# Altium PCB ESC.PcbDoc
Units mil, origin at the board's own origin, x right, y up, seen from the top; angles counter-clockwise.
Board outline 1806 x 1305.72 mil, 2 copper layers (Top Layer, Bottom Layer); 51 components, 38 nets, 153 pads, 0 vias.
Unrouted connection lines stored in the file: 79.
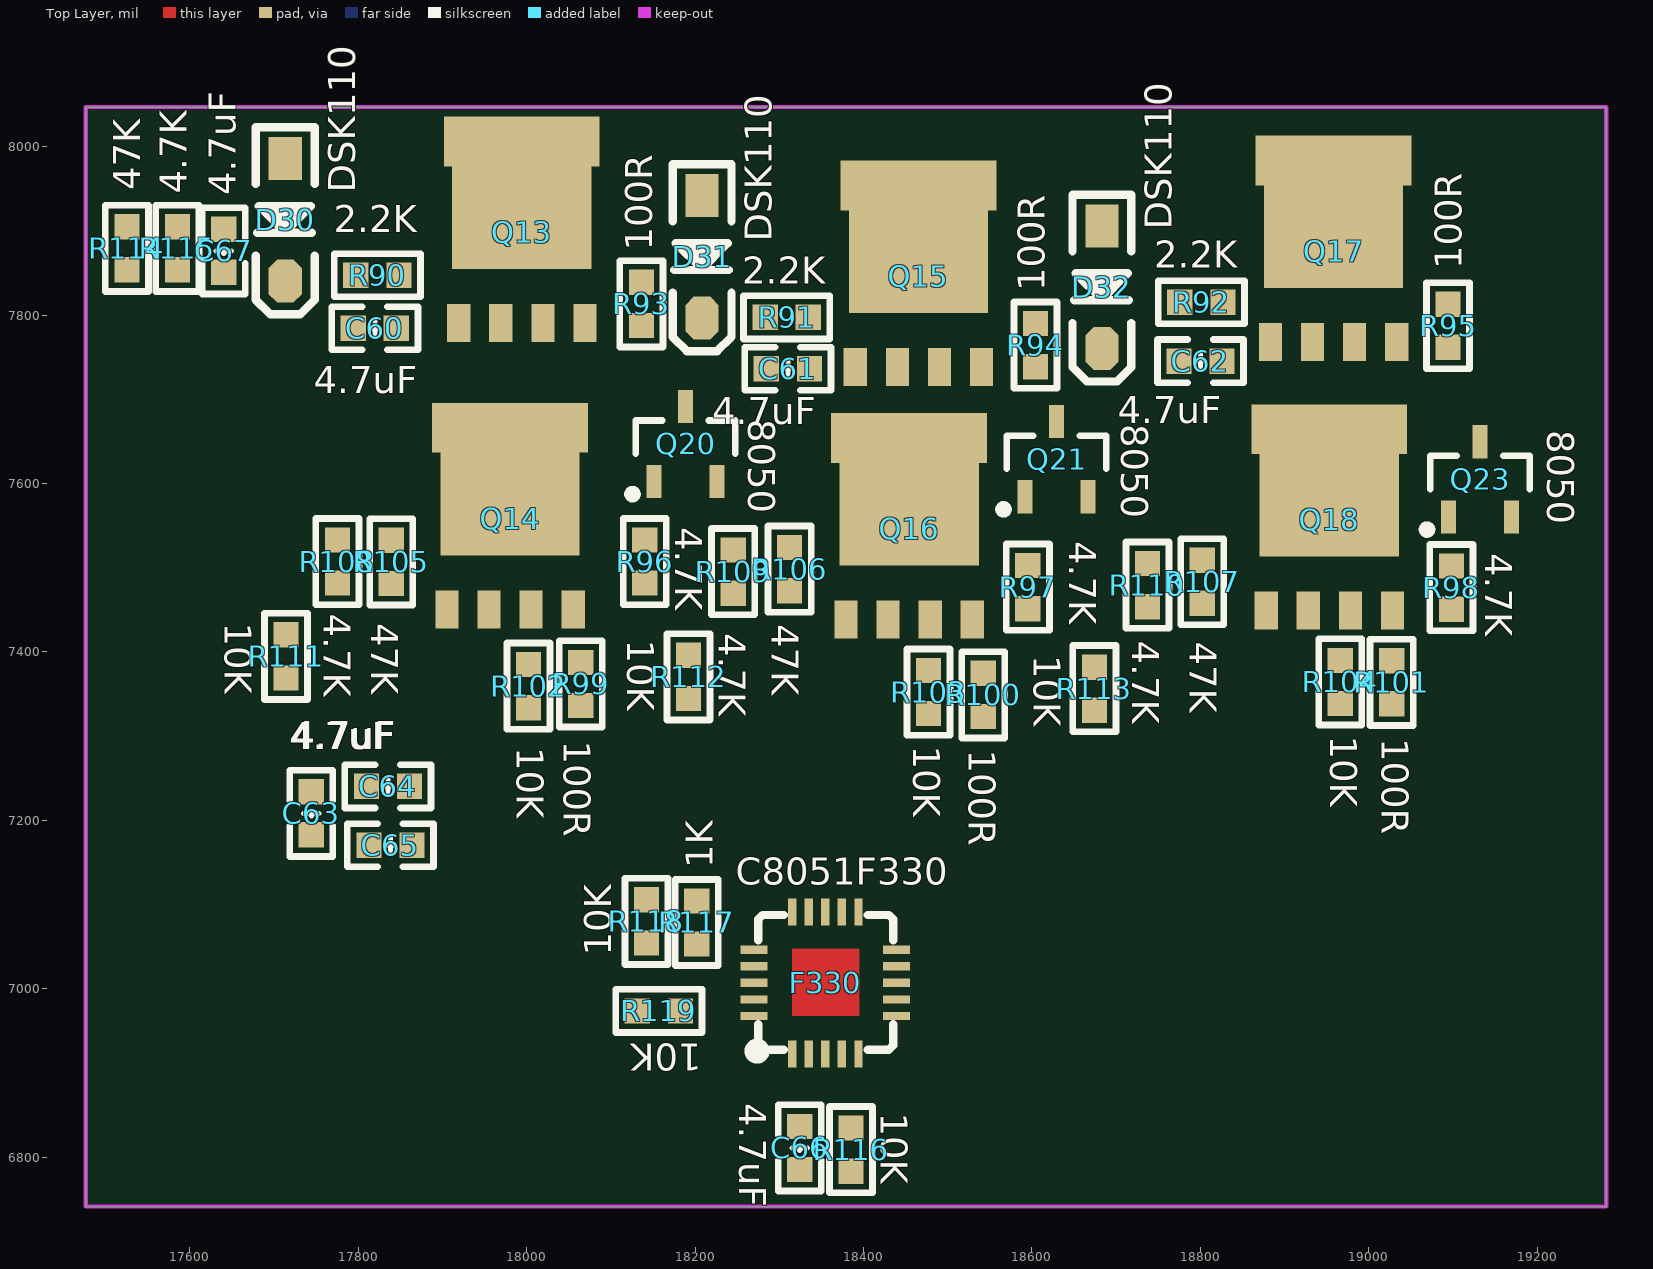
[diagram p0: Top Layer view]
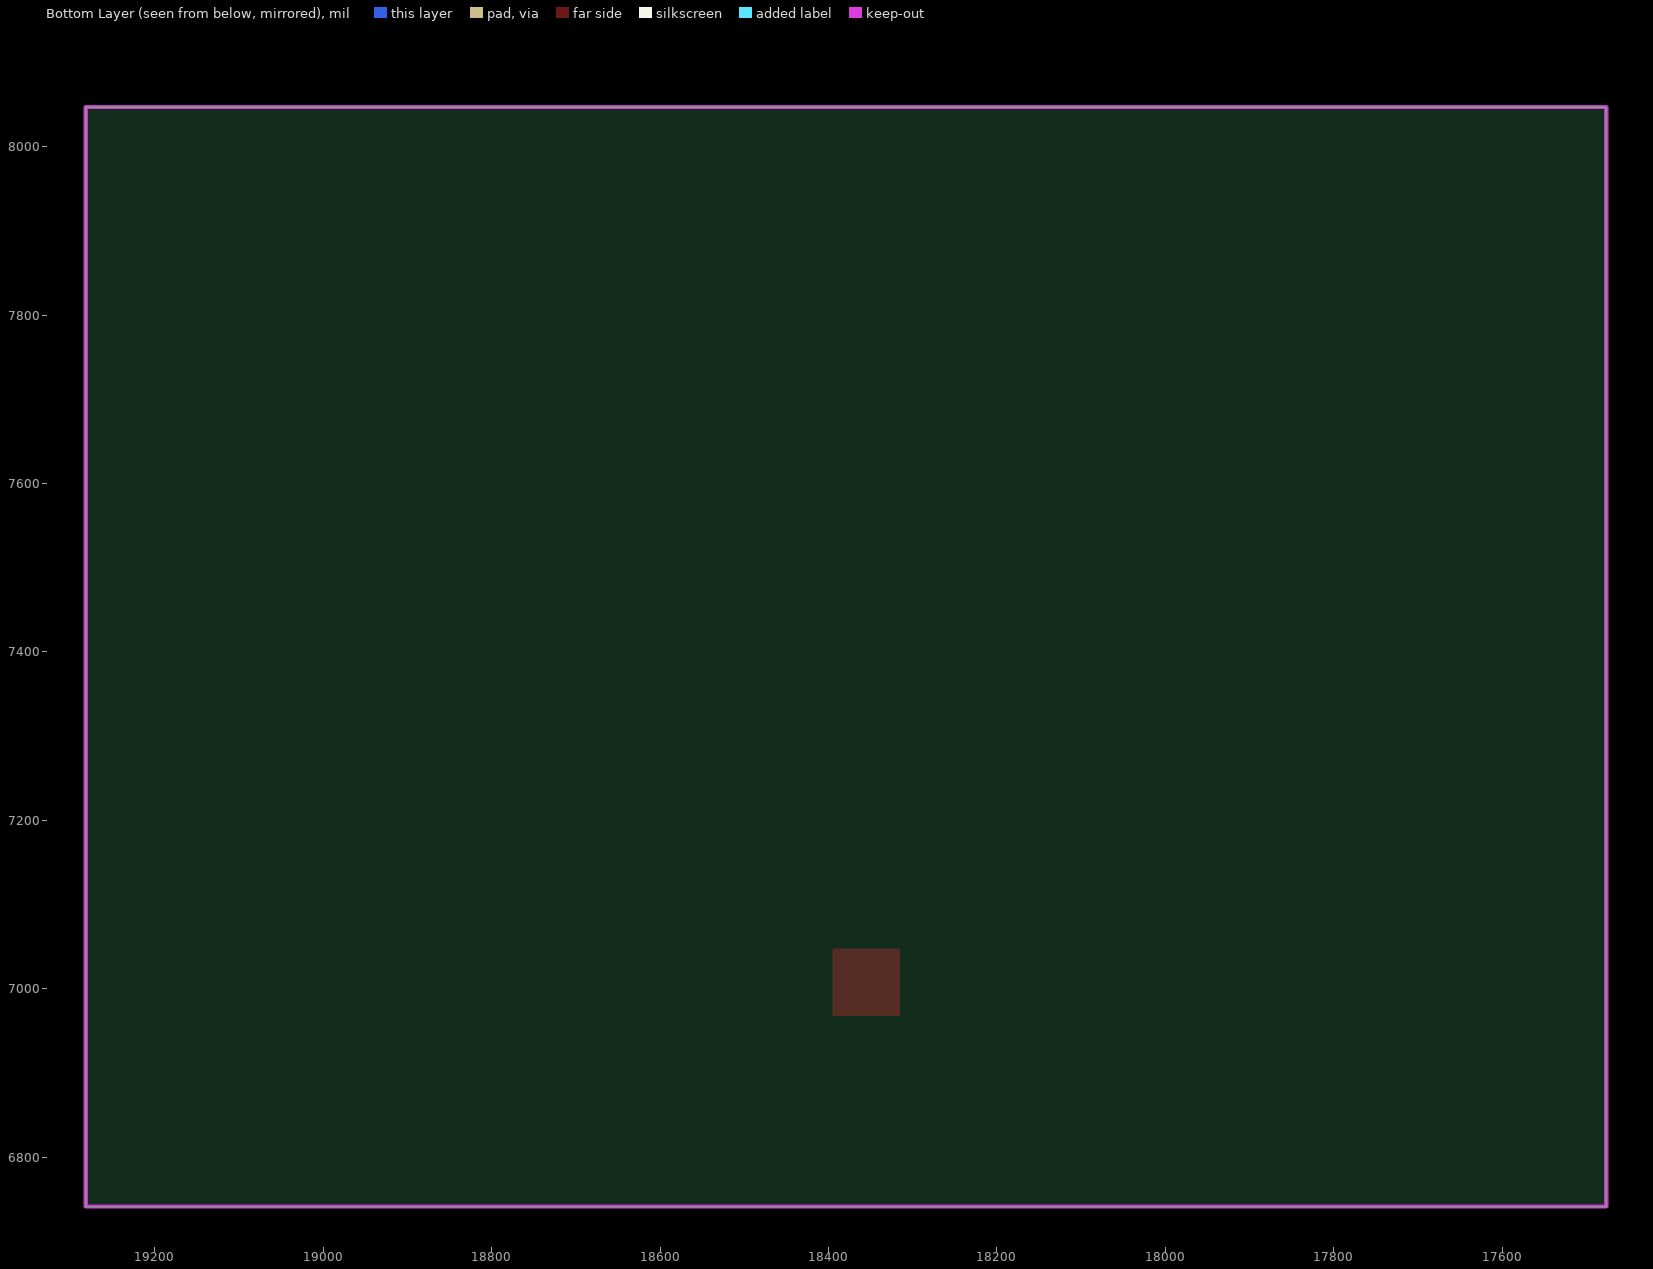
[diagram p1: Bottom Layer view, seen from below]

## Layer stack, top to bottom
Top Solder: solder mask 0.4, Solder Resist, Dk 3.5
Top Layer: signal copper 1.4
Dielectric1: core 12.6, FR-4, Dk 4.8
Bottom Layer: signal copper 1.4
Bottom Solder: solder mask 0.4, Solder Resist, Dk 3.5

## Board outline
17476.22,6741.22 19282.22,6741.22 19282.22,8046.94 17476.22,8046.94

## Design rules (kind name [scope] priority, off if disabled: settings)
Clearance [All] p1: gap=6 except(10: Arc-Poly Arc-Region Track-Poly Track-Region SMDPad-Poly SMDPad-Region THPad-Poly THPad-Region Via-Poly Via-Region Fill-Poly Fill-Region Poly-Poly Poly-Region Region-Region)
ComponentClearance [All] p1 off: gap=10 collisioncheckmode=3 verticalgap=10 showdistances=FALSE
HoleToHoleClearance [All] p1: gap=6 allowstackedmicrovias=TRUE
MinimumSolderMaskSliver [All] p1 off: minsoldermaskwidth=10
PlaneClearance [All] p1: clearance=15
PlaneConnect [All] p1: planeconnectstyle=Direct reliefexpansion=20 reliefentries=4 reliefconductorwidth=10 reliefairgap=10
PolygonConnect [All] p1: connectstyle=Direct reliefconductorwidth=10 reliefentries=4 polygonreliefangle="90 Angle" airgapwidth=10
RoomDefinition ESC [InComponentClass('ESC')] p1: confinementstyle=ConfineIn formatcopy=TRUE lockcomponents=FALSE outline 0,0 2000,0 2000,1000 0,1000
RoutingCorners [All] p1: cornerstyle=45-Degree minsetback=500 maxsetback=100
RoutingVias [All] p1: holewidth=12 width=24 viastyle="Through Hole" minholewidth=12 minwidth=24 maxholewidth=50 maxwidth=200
SilkToSilkClearance [All] p1 off: silktosilkclearance=10
SilkToSolderMaskClearance SilkscreenOverComponentPads [IsPad] p1 off: minsilkscreentomaskgap=10 clearancetoexposedcopper=TRUE
SolderMaskExpansion [All] p1: expansion=4
Width [All] p1: maxlimit=100 minlimit=6 preferedwidth=8
22 further rules are at their usual default settings.

## Components (designator, comment, footprint, x,y, rotation, side; value= is the part's Value field where it differs from the comment)
C60 "4.7uF" "C 0603_L" 17819.62,7784.21 r180 top
C61 "4.7uF" "C 0603_L" 18310.22,7736.22 r180 top
C62 "4.7uF" "C 0603_L" 18800.22,7745.22 r180 top
C63 "4.7uF" "C 0603_L" 17744.22,7208.22 r90 top
C64 "4.7uF" "C 0603_L" 17835.22,7240.22 r180 top
C65 "4.7uF" "C 0603_L" 17838.22,7170.22 r180 top
C66 "4.7uF" "C 0603_L" 18324.21,6810.81 r90 top
C67 "4.7uF" "C 0603_L" 17640.22,7876.22 r90 top
D30 "DSK110" SOD-123F 17713.22,7913.05 r270 top
D31 "DSK110" SOD-123F 18208.22,7869.05 r270 top
D32 "DSK110" SOD-123F 18683.22,7833.05 r270 top
F330 "C8051F330" QFN20_4*4_L 18354.59,7006.85 r90 top
Q13 "NTMFS5C628NLT" SO_8FL_DFN5 17994.22,7898.22 r0 top
Q14 "NTMFS5C628NLT" SO_8FL_DFN5 17980.22,7558.22 r0 top
Q15 "NTMFS5C628NLT" SO_8FL_DFN5 18465.22,7845.99 r0 top
Q16 "NTMFS5C628NLT" SO_8FL_DFN5 18454.22,7546.22 r0 top
Q17 "NTMFS5C628NLT" SO_8FL_DFN5 18958.22,7875.71 r0 top
Q18 "NTMFS5C628NLT" SO_8FL_DFN5 18953.22,7556.71 r0 top
Q20 "8050" SOT23-3L 18188.62,7647.22 r0 top
Q21 "8050" SOT23-3L 18629.22,7629.22 r0 top
Q23 "8050" SOT23-3L 19132.22,7605.22 r0 top
R90 "2.2K" "R 0603_L" 17822.62,7847.21 r180 top
R91 "2.2K" "R 0603_L" 18308.81,7797.21 r180 top
R92 "2.2K" "R 0603_L" 18801.22,7815.22 r180 top
R93 "100R" "R 0603_L" 18136.22,7813.22 r270 top
R94 "100R" "R 0603_L" 18604.22,7764.22 r270 top
R95 "100R" "R 0603_L" 19094.22,7787.22 r270 top
R96 "4.7K" "R 0603_L" 18140.22,7507.22 r90 top
R97 "4.7K" "R 0603_L" 18595.21,7476.81 r90 top
R98 "4.7K" "R 0603_L" 19098.22,7476.22 r90 top
R99 "100R" "R 0603_L" 18064.22,7361.81 r270 top
R100 "100R" "R 0603_L" 18542.22,7348.81 r270 top
R101 "100R" "R 0603_L" 19027.22,7363.81 r270 top
R102 "10K" "R 0603_L" 18002.22,7359.22 r90 top
R103 "10K" "R 0603_L" 18477.22,7352.22 r90 top
R104 "10K" "R 0603_L" 18966.22,7364.22 r90 top
R105 "47K" "R 0603_L" 17839.21,7506.81 r90 top
R106 "47K" "R 0603_L" 18312.22,7498.22 r90 top
R107 "47K" "R 0603_L" 18802.22,7483.22 r90 top
R108 "4.7K" "R 0603_L" 17775.22,7507.22 r270 top
R109 "4.7K" "R 0603_L" 18245.22,7495.22 r270 top
R110 "4.7K" "R 0603_L" 18737.22,7479.22 r270 top
R111 "10K" "R 0603_L" 17714.21,7394.63 r90 top
R112 "10K" "R 0603_L" 18192.22,7370.22 r90 top
R113 "10K" "R 0603_L" 18674.22,7356.22 r90 top
R114 "47K" "R 0603_L" 17525.22,7879.22 r270 top
R115 "4.7K" "R 0603_L" 17585.22,7879.22 r270 top
R116 "10K" "R 0603_L" 18385.21,6808.81 r90 top
R117 "1K" "R 0603_L" 18201.96,7078.53 r270 top
R118 "10K" "R 0603_L" 18142.21,7079.81 r90 top
R119 "10K" "R 0603_L" 18156.96,6973.53 r0 top

## Footprints (in the part's own frame and the unit in brackets; to place one, negate y for a bottom-side part, rotate by r counter-clockwise, add the part's x,y. Pads: shape width x height; smd on the part's side, far side on the other; paste and mask are expansions set on the pad)
"C 0603_L" [mil] "无极性贴片电容"
  rect 30x30 smd: 1(-25.59,0) 2(25.59,0)
  silkscreen extent -51,-26 51,26, body extent -31,-16 31,16, height 32
QFN20_4*4_L [mm]
  rect 0.813x0.25 smd: 1(-2.143,1) 2(-2.143,0.5) 3(-2.143,0) 4(-2.143,-0.5) 5(-2.143,-1) 11(2.143,-1) 12(2.143,-0.5) 13(2.143,0) 14(2.143,0.5) 15(2.143,1)
  rect 0.25x0.813 smd: 6(-1,-2.143) 7(-0.5,-2.143) 8(0,-2.143) 9(0.5,-2.143) 10(1,-2.143) 16(1,2.143) 17(0.5,2.143) 18(0,2.143) 19(-0.5,2.143) 20(-1,2.143)
  Top Layer region: -1,-1.032 1.032,-1.032 1.032,1 -1,1
  silkscreen extent -2.18,-2.05 2.05,2.18, body extent -2,-2 2,2, height 0.9
"R 0603_L" [mil] "1/10W贴片电阻"
  rect 30x30 smd: 1(-25.59,0) 2(25.59,0)
  silkscreen extent -51,-26 51,26, body extent -31,-16 32,16, height 16
SO_8FL_DFN5 [mm]
  rect 4.2x2.2 smd paste-10 mask+0.075: D(0,-0.012) D(0,1.338)
  rect 4.7x1.5 smd paste-10 mask+0.075: D(0,2.738)
  rect 0.7x1.15 smd paste-0.05 mask+0.075: G(1.905,-2.737) S(-1.905,-2.737) S(-0.635,-2.737) S(0.635,-2.737)
  body extent -2.57,-2.96 2.58,3.19, height 1.13
SOD-123F [mm] "2.7x1.6X1.1mm（长宽高，不包括引脚）"
  rect 1.3x1 smd: 1(-1.85,0)
  oct 1.3x1 smd: 2(1.85,0)
  silkscreen extent -2.79,-0.89 2.84,0.89, body extent -1.9,-0.8 1.9,0.8, height 1.15
SOT23-3L [mm] "3x1.3x1mm(长宽高)"
  rect 0.45x1 smd: 1(-0.95,-1.143) 2(0.95,-1.143) 3(0,1.125)
  silkscreen extent -1.72,-1.65 1.5,0.7, body extent -1.5,-1.2 1.5,1.2, height 1.05

## Part data
C60 C61 C62 C63 C64 C65 C66 C67: library part C
D30 D31 D32: "通用二极管 100V-1A"
F330: "C8051F330单片机"
Q13 Q14 Q15 Q16 Q17 Q18: "MOSFET N-CH 60V SO8FL"
Q20 Q21 Q23: library part 8050NPN
R90 R91 R92 R93 R94 R95 R96 R97 R98 R99 R100 R101 R102 R103 R104 R105 R106 R107 R108 R109 R110 R111 R112 R113 R114 R115 R116 R117 R118 R119: library part R

## Nets (pads, with @x,y where several pads share a name; then routed paths per layer and width w, separated by ;. In a path a pad name is that pad's centre, name@x,y a point inside that pad or via, vN(x,y) a via of type N, cw(c..) or ccw(c..) an arc to the next point about the centre after c; other vN are vias at no path point)
CD: F330.5
CK: F330.4 R116.1
GND: C66.1 C67.2 F330.2 Q14.S Q16.S Q18.S Q20.2 Q21.2 Q23.2 R102.1 R103.1 R104.1 R108.1 R109.1 R110.1 R115.1 R119.1
M_U: C60.1 Q13.S Q14.D R105.2
M_V: C61.1 Q15.S Q16.D R106.2
M_W: C62.1 Q17.S Q18.D R107.2
NetC60_2: C60.2 D30.2 R90.2
NetC61_2: C61.2 D31.2 R91.2
NetC62_2: C62.2 D32.2 R92.2
NetC67_1: C67.1 F330.13 R114.2 R115.2
NetF330_16: F330.16 R117.1 R118.2
NetF330_17: F330.17 R117.2
NetF330_20: F330.20 R119.2
NetQ20_1: Q20.1 R96.2
NetQ20_3: Q20.3 R90.1 R93.1
NetQ21_1: Q21.1 R97.2
NetQ21_3: Q21.3 R91.1 R94.1
NetQ23_1: Q23.1 R98.2
NetQ23_3: Q23.3 R92.1 R95.1
POWER: D30.1 D31.1 D32.1 Q13.D Q15.D Q17.D R114.1
PWM_IN: R118.1
SCOM: F330.18 R111.1 R112.1 R113.1
SU: C63.2 C64.2 F330.19 R105.1 R108.2 R111.2
SV: C64.1 C65.1 F330.15 R106.1 R109.2 R112.2
SW: C63.1 C65.2 F330.1 R107.1 R110.2 R113.2
U_H: Q13.G R93.2
U_L: Q14.G R99.1 R102.2
UH: F330.6 R96.1
UL: F330.7 R99.2
V_H: Q15.G R94.2
V_L: Q16.G R100.1 R103.2
VCC3.3: C66.2 F330.3 R116.2
VH: F330.10 R97.1
VL: F330.11 R100.2
W_H: Q17.G R95.2
W_L: Q18.G R101.1 R104.2
WH: F330.8 R98.1
WL: F330.9 R101.2
pads on no net: F330.12 F330.14

## Keep-outs
Keep-Out Layer:
  the board outline again, w5